# Altium PCB LED6432Clock.PcbDoc (part 3 of 6)
Units mm, origin at the board's own origin, x right, y up, seen from the top; angles counter-clockwise.
Board outline 152.4 x 101.6 mm, 2 copper layers (Top Layer, Bottom Layer); 48 components, 0 nets, 638 pads, 127 vias.
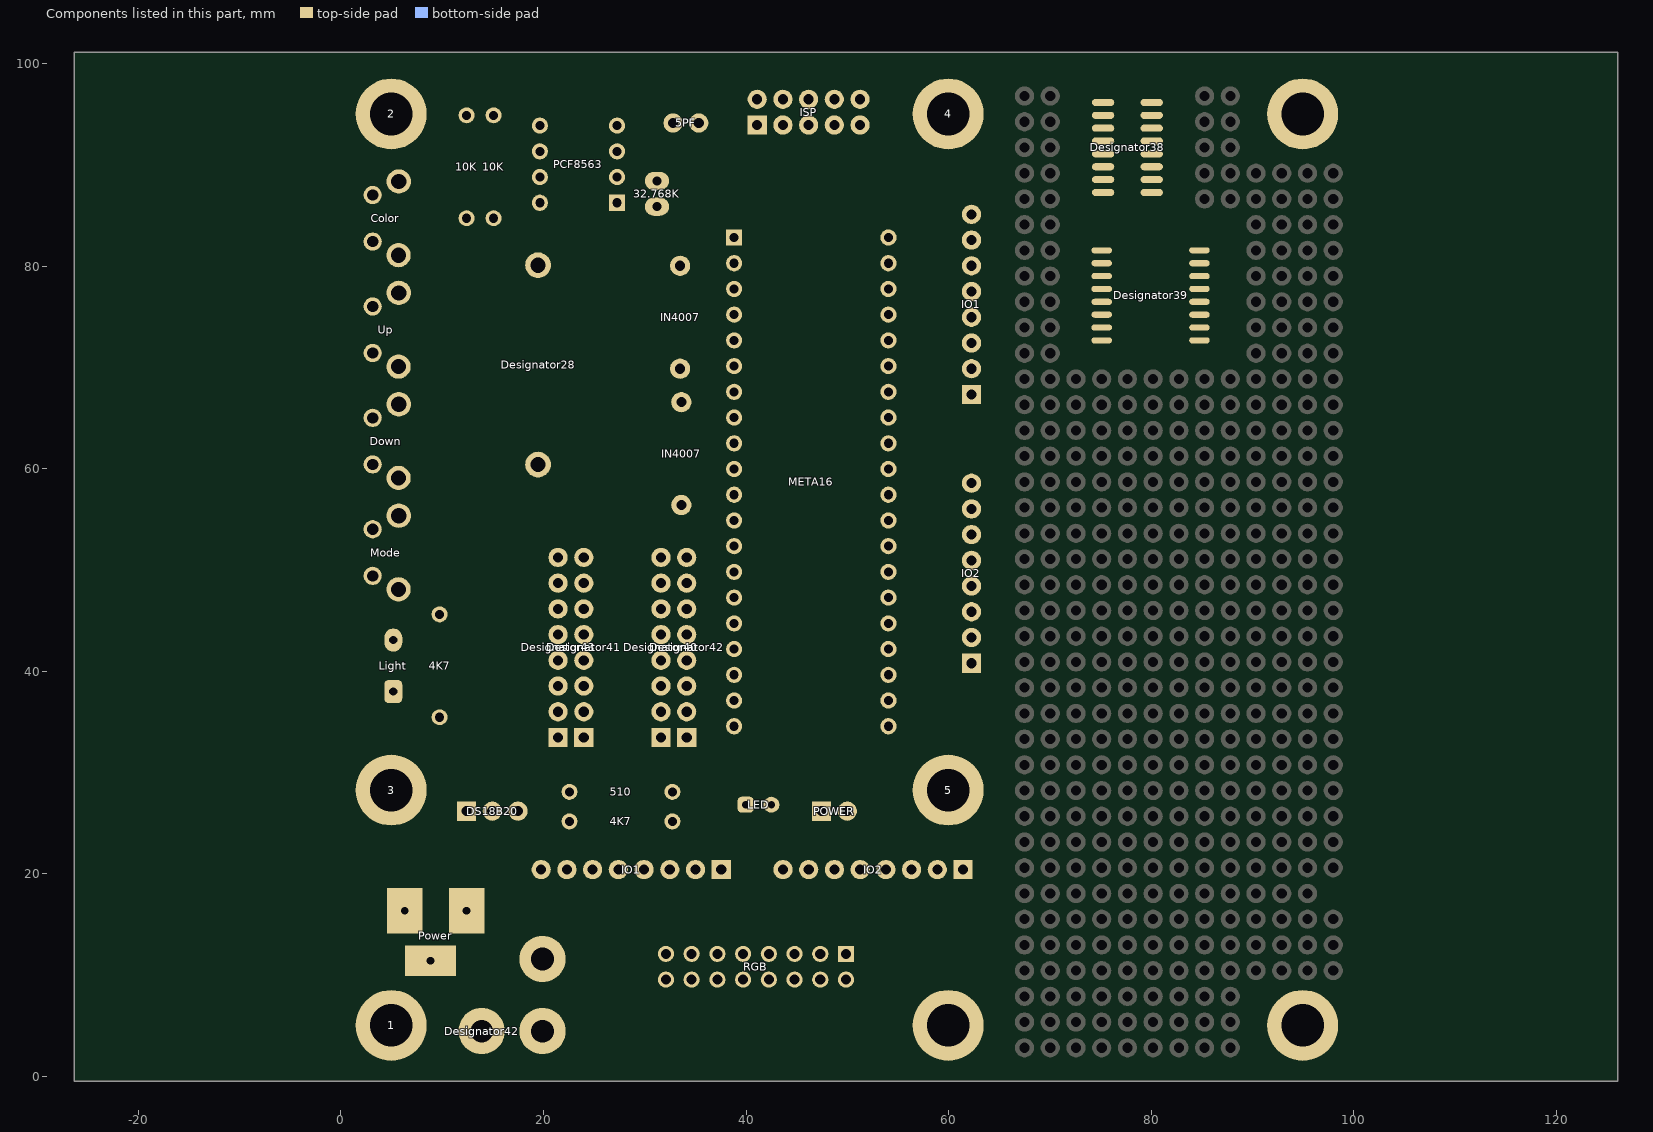
[diagram p3: the components of this part, seen from the top]

## Via types
v1: diameter 0.6, hole 0.3, Top Layer to Bottom Layer, 67 vias
v2: diameter 1.27, hole 0.711, Top Layer to Bottom Layer, 60 vias

## Nets (pads, with @x,y where several pads share a name; then routed paths per layer and width w, separated by ;. In a path a pad name is that pad's centre, name@x,y a point inside that pad or via, vN(x,y) a via of type N, cw(c..) or ccw(c..) an arc to the next point about the centre after c; other vN are vias at no path point) (continued)
copper on no net: (continued)
  Top Layer w0.16: 88.87,72.885 cw(c87.385,71.399) 89.485,71.399 ccw(c87.385,71.399) 88.87,72.885 ; 88.87,72.885 ccw(c90.355,74.37) 90.355,72.269 cw(c90.355,74.37) 88.87,72.885 ; 88.87,75.425 cw(c87.385,73.939) 89.485,73.939 ccw(c87.385,73.939) 88.87,75.425 ; 88.87,75.425 ccw(c90.355,76.91) 90.355,74.809 cw(c90.355,76.91) 88.87,75.425 ; 88.92,83.972 ccw(c88.92,84.911) 89.737,84.449 ; 88.92,83.972 ccw(c88.92,84.911) 89.737,84.449 ; 88.92,83.972 ccw(c88.92,84.911) 89.737,84.449 ; 88.92,83.972 ccw(c88.92,84.911) 89.737,84.449 ; 89.014,83.972 cw(c89.014,82.848) 89.836,83.615 ; 89.014,83.972 cw(c89.014,82.848) 89.836,83.615 ; 89.014,83.972 cw(c89.014,82.848) 89.836,83.615 ; 89.014,83.972 cw(c89.014,82.848) 89.836,83.615 ; 89.06,80.264 cw(c90.116,79.208) 90.267,80.694 ccw(c90.116,79.208) 89.06,80.264 ; 89.06,80.264 ccw(c88.004,81.32) 89.49,81.471 cw(c88.004,81.32) 89.06,80.264 ; 89.143,72.611 cw(c87.931,71.399) 89.645,71.399 ccw(c87.931,71.399) 89.143,72.611 ; 89.143,72.611 ccw(c90.355,73.823) 90.355,72.109 cw(c90.355,73.823) 89.143,72.611 ; 89.143,75.151 cw(c87.931,73.939) 89.645,73.939 ccw(c87.931,73.939) 89.143,75.151 ; 89.143,75.151 ccw(c90.355,76.363) 90.355,74.649 cw(c90.355,76.363) 89.143,75.151 ; 89.162,77.673 cw(c88.311,76.823) 89.497,76.623 ccw(c88.311,76.823) 89.162,77.673 ; 89.162,77.673 ccw(c90.012,78.524) 90.211,77.337 cw(c90.012,78.524) 89.162,77.673 ; 89.195,83.972 ccw(c89.195,84.756) 89.877,84.37 ; 89.195,83.972 ccw(c89.195,84.756) 89.877,84.37 ; 89.195,83.972 ccw(c89.195,84.756) 89.877,84.37 ; 89.195,83.972 ccw(c89.195,84.756) 89.877,84.37 ; 89.298,80.502 cw(c90.16,79.64) 90.284,80.853 ccw(c90.16,79.64) 89.298,80.502 ; 89.298,80.502 ccw(c88.436,81.364) 89.649,81.488 cw(c88.436,81.364) 89.298,80.502 ; 89.381,77.454 cw(c88.687,76.759) 89.655,76.597 ccw(c88.687,76.759) 89.381,77.454 ; 89.381,77.454 ccw(c90.075,78.148) 90.238,77.18 cw(c90.075,78.148) 89.381,77.454 ; 89.382,83.972 cw(c89.382,83.192) 89.953,83.724 ; 89.382,83.972 cw(c89.382,83.192) 89.953,83.724 ; 89.382,83.972 cw(c89.382,83.192) 89.953,83.724 ; 89.382,83.972 cw(c89.382,83.192) 89.953,83.724 ; 89.416,72.338 cw(c88.478,71.399) 89.805,71.399 ccw(c88.478,71.399) 89.416,72.338 ; 89.416,72.338 ccw(c90.355,73.277) 90.355,71.949 cw(c90.355,73.277) 89.416,72.338 ; 89.416,74.878 cw(c88.478,73.939) 89.805,73.939 ccw(c88.478,73.939) 89.416,74.878 ; 89.416,74.878 ccw(c90.355,75.817) 90.355,74.489 cw(c90.355,75.817) 89.416,74.878 ; 89.537,80.741 cw(c90.204,80.073) 90.3,81.012 ccw(c90.204,80.073) 89.537,80.741 ; 89.537,80.741 ccw(c88.869,81.408) 89.808,81.504 cw(c88.869,81.408) 89.537,80.741 ; 89.601,77.234 cw(c89.063,76.696) 89.813,76.57 ccw(c89.063,76.696) 89.601,77.234 ; 89.601,77.234 ccw(c90.138,77.772) 90.264,77.022 cw(c90.138,77.772) 89.601,77.234 ; 12.394,70.341 ccw(c12.192,70.543) 12.478,70.543 cw(c12.192,70.543) 12.394,70.341 ; 12.429,70.376 cw(c12.688,70.117) 12.696,70.483 ccw(c12.688,70.117) 12.429,70.376 ; 19.358,42.192 ccw(c20.64,43.473) 21.211,41.753 cw(c20.64,43.473) 19.358,42.192 ; 19.372,44.819 ccw(c20.762,46.208) 21.257,44.307 cw(c20.762,46.208) 19.372,44.819 ; 19.541,42.008 ccw(c20.731,43.198) 21.262,41.601 cw(c20.731,43.198) 19.541,42.008 ; 19.57,44.621 ccw(c20.843,45.894) 21.297,44.152 cw(c20.843,45.894) 19.57,44.621 ; 19.725,41.825 ccw(c20.823,42.923) 21.312,41.449 cw(c20.823,42.923) 19.725,41.825 ; 19.768,44.423 ccw(c20.925,45.581) 21.337,43.997 cw(c20.925,45.581) 19.768,44.423 ; 19.907,40.043 ccw(c21.435,41.571) 21.435,39.409 cw(c21.435,41.571) 19.907,40.043 ; 19.908,41.642 ccw(c20.914,42.648) 21.363,41.298 cw(c20.914,42.648) 19.908,41.642 ; 19.914,49.662 ccw(c20.79,50.539) 21.2,49.369 cw(c20.79,50.539) 19.914,49.662 ; 19.965,44.226 ccw(c21.007,45.267) 21.377,43.842 cw(c21.007,45.267) 19.965,44.226 ; 19.968,39.981 cw(c18.526,38.539) 20.565,38.539 ccw(c18.526,38.539) 19.968,39.981 ; 20.091,41.459 ccw(c21.005,42.373) 21.413,41.146 cw(c21.005,42.373) 20.091,41.459 ; 20.093,49.483 ccw(c20.883,50.273) 21.253,49.218 cw(c20.883,50.273) 20.093,49.483 ; 20.163,44.028 ccw(c21.088,44.954) 21.418,43.687 cw(c21.088,44.954) 20.163,44.028 ; 20.18,39.769 ccw(c21.435,41.025) 21.435,39.249 cw(c21.435,41.025) 20.18,39.769 ; 20.241,39.708 cw(c19.073,38.539) 20.725,38.539 ccw(c19.073,38.539) 20.241,39.708 ; 20.273,49.303 ccw(c20.977,50.006) 21.306,49.067 cw(c20.977,50.006) 20.273,49.303 ; 20.274,41.275 ccw(c21.097,42.098) 21.464,40.994 cw(c21.097,42.098) 20.274,41.275 ; 20.345,49.231 cw(c19.814,48.699) 20.565,48.699 ccw(c19.814,48.699) 20.345,49.231 ; 20.361,43.831 ccw(c21.17,44.64) 21.458,43.532 cw(c21.17,44.64) 20.361,43.831 ; 20.453,39.496 ccw(c21.435,40.479) 21.435,39.089 cw(c21.435,40.479) 20.453,39.496 ; 20.453,49.123 ccw(c21.07,49.74) 21.359,48.916 cw(c21.07,49.74) 20.453,49.123 ; 20.457,41.092 ccw(c21.188,41.823) 21.514,40.842 cw(c21.188,41.823) 20.457,41.092 ; 20.514,39.435 cw(c19.619,38.539) 20.885,38.539 ccw(c19.619,38.539) 20.514,39.435 ; 20.726,39.223 ccw(c21.435,39.932) 21.435,38.929 cw(c21.435,39.932) 20.726,39.223 ; v1@26.372,82.608 cw(c27.008,82.608) 26.558,83.058 ccw(c27.008,82.608) v1@26.372,82.608 ; v1@26.532,82.608 cw(c27.554,82.608) 26.831,83.331 ccw(c27.554,82.608) v1@26.532,82.608 ; 31.577,12.6 ccw(c29.428,14.748) 32.467,14.748 cw(c29.428,14.748) 31.577,12.6 ; 31.69,12.486 ccw(c29.815,14.362) 32.467,14.362 cw(c29.815,14.362) 31.69,12.486 ; 31.804,12.373 ccw(c30.201,13.976) 32.467,13.976 cw(c30.201,13.976) 31.804,12.373 ; 31.917,12.26 ccw(c30.587,13.59) 32.467,13.59 cw(c30.587,13.59) 31.917,12.26 ; 32.03,12.147 ccw(c30.973,13.203) 32.467,13.203 cw(c30.973,13.203) 32.03,12.147 ; 32.143,12.034 ccw(c31.36,12.817) 32.467,12.817 cw(c31.36,12.817) 32.143,12.034 ; 32.467,12.909 ccw(c32.905,12.909) 32.596,12.6 cw(c32.905,12.909) 32.467,12.909 ; 33.678,51.782 ccw(c32.755,52.876) 34.186,52.876 cw(c32.755,52.876) 33.678,51.782 ; 33.781,51.66 ccw(c33.045,52.532) 34.186,52.532 cw(c33.045,52.532) 33.781,51.66 ; 34.186,52.445 ccw(c35.341,52.445) 34.524,51.628 cw(c35.341,52.445) 34.186,52.445 ; 34.186,52.831 ccw(c35.727,52.831) 34.637,51.741 cw(c35.727,52.831) 34.186,52.831 ; 34.186,53.217 ccw(c36.113,53.217) 34.751,51.855 cw(c36.113,53.217) 34.186,53.217 ; 36.32,81.775 cw(c37.458,81.775) 36.653,82.58 ccw(c37.458,81.775) 36.32,81.775 ; 36.32,82.161 cw(c37.072,82.161) 36.54,82.693 ccw(c37.072,82.161) 36.32,82.161 ; 36.657,12.6 ccw(c35.443,13.814) 37.16,13.814 cw(c35.443,13.814) 36.657,12.6 ; 36.77,12.486 ccw(c35.829,13.427) 37.16,13.427 cw(c35.829,13.427) 36.77,12.486 ; 36.884,12.373 ccw(c36.216,13.041) 37.16,13.041 cw(c36.216,13.041) 36.884,12.373 ; 37.16,13.071 ccw(c38.147,13.071) 37.449,12.373 cw(c38.147,13.071) 37.16,13.071 ; 37.16,13.457 ccw(c38.533,13.457) 37.562,12.486 cw(c38.533,13.457) 37.16,13.457 ; 37.16,13.844 ccw(c38.92,13.844) 37.676,12.6 cw(c38.92,13.844) 37.16,13.844 ; v1@38.933,88.295 cw(c38.741,88.103) 39.012,88.103 ccw(c38.741,88.103) v1@38.933,88.295 ; 39.012,87.962 cw(c39.343,87.962) 39.19,88.255 ccw(c39.343,87.962) 39.012,87.962 ; v1@40.764,13.484 cw(c40.327,13.047) 40.945,13.047 ccw(c40.327,13.047) v1@40.764,13.484 ; 40.945,13.17 cw(c41.389,13.17) 41.075,13.484 ccw(c41.389,13.17) 40.945,13.17 ; 41.918,17.839 ccw(c39.464,20.294) 42.934,20.395 cw(c39.464,20.294) 41.918,17.839 ; 42.181,18.101 ccw(c39.973,20.309) 43.094,20.399 cw(c39.973,20.309) 42.181,18.101 ; 42.443,18.364 ccw(c40.483,20.324) 43.254,20.404 cw(c40.483,20.324) 42.443,18.364 ; v1@42.489,42.53 ccw(c41.561,43.458) 42.873,43.458 cw(c41.561,43.458) v1@42.489,42.53 ; v1@42.602,42.417 ccw(c41.948,43.072) 42.873,43.072 cw(c41.948,43.072) v1@42.602,42.417 ; 42.705,18.626 ccw(c40.993,20.338) 43.413,20.409 cw(c40.993,20.338) 42.705,18.626 ; v1@42.715,42.304 ccw(c42.334,42.685) 42.873,42.685 cw(c42.334,42.685) v1@42.715,42.304 ; 42.968,18.888 ccw(c41.503,20.353) 43.573,20.413 cw(c41.503,20.353) 42.968,18.888 ; 43.138,68.475 cw(c42.286,67.622) 43.491,67.622 ccw(c42.286,67.622) 43.138,68.475 ; 43.23,19.151 ccw(c42.013,20.368) 43.733,20.418 cw(c42.013,20.368) 43.23,19.151 ; v1@43.253,13.484 cw(c42.51,12.741) 43.561,12.741 ccw(c42.51,12.741) v1@43.253,13.484 ; v1@43.366,13.597 cw(c42.896,13.127) 43.561,13.127 ccw(c42.896,13.127) v1@43.366,13.597 ; 43.411,68.202 cw(c42.832,67.622) 43.651,67.622 ccw(c42.832,67.622) 43.411,68.202 ; 43.492,19.413 ccw(c42.522,20.383) 43.893,20.423 cw(c42.522,20.383) 43.492,19.413 ; 43.61,72.933 cw(c44.669,72.933) 43.92,73.682 ccw(c44.669,72.933) 43.61,72.933 ; 43.61,73.32 cw(c44.282,73.32) 43.807,73.795 ccw(c44.282,73.32) 43.61,73.32 ; 43.684,67.929 cw(c43.378,67.622) 43.811,67.622 ccw(c43.378,67.622) 43.684,67.929 ; 43.746,82.074 cw(c44.425,81.395) 44.425,82.355 ccw(c44.425,81.395) 43.746,82.074 ; 44.019,82.347 cw(c44.425,81.941) 44.425,82.515 ccw(c44.425,81.941) 44.019,82.347 ; 46.05,15.345 cw(c47.622,15.345) 46.511,16.456 ccw(c47.622,15.345) 46.05,15.345 ; 46.05,15.731 cw(c47.236,15.731) 46.397,16.569 ccw(c47.236,15.731) 46.05,15.731 ; 46.05,16.117 cw(c46.849,16.117) 46.284,16.682 ccw(c46.849,16.117) 46.05,16.117 ; 46.05,16.503 cw(c46.463,16.503) 46.171,16.795 ccw(c46.463,16.503) 46.05,16.503 ; 46.069,16.453 ccw(c45.91,16.612) 46.135,16.612 cw(c45.91,16.612) 46.069,16.453 ; 47.014,91.931 ccw(c45.009,93.937) 47.845,93.937 cw(c45.009,93.937) 47.014,91.931 ; 47.287,92.204 ccw(c45.555,93.937) 48.005,93.937 cw(c45.555,93.937) 47.287,92.204 ; 47.561,92.478 ccw(c46.101,93.937) 48.165,93.937 cw(c46.101,93.937) 47.561,92.478 ; 47.75,92.667 cw(c48.715,91.702) 48.715,93.067 ccw(c48.715,91.702) 47.75,92.667 ; 47.834,92.751 ccw(c46.648,93.937) 48.325,93.937 cw(c46.648,93.937) 47.834,92.751 ; 48.023,92.94 cw(c48.715,92.249) 48.715,93.227 ccw(c48.715,92.249) 48.023,92.94 ; 48.107,93.024 ccw(c47.194,93.937) 48.485,93.937 cw(c47.194,93.937) 48.107,93.024 ; 49.375,91.498 ccw(c46.936,93.937) 50.385,93.937 cw(c46.936,93.937) 49.375,91.498 ; 49.648,91.771 ccw(c47.482,93.937) 50.545,93.937 cw(c47.482,93.937) 49.648,91.771 ; 49.921,92.044 ccw(c48.028,93.937) 50.705,93.937 cw(c48.028,93.937) 49.921,92.044 ; 50.194,92.317 ccw(c48.574,93.937) 50.865,93.937 cw(c48.574,93.937) 50.194,92.317 ; 50.467,92.59 ccw(c49.121,93.937) 51.025,93.937 cw(c49.121,93.937) 50.467,92.59 ; 50.724,92.847 cw(c51.255,92.316) 51.255,93.067 ccw(c51.255,92.316) 50.724,92.847 ; 50.74,92.863 ccw(c49.667,93.937) 51.185,93.937 cw(c49.667,93.937) 50.74,92.863 ; v1@50.795,52.36 ccw(c50.235,52.92) 51.026,52.92 cw(c50.235,52.92) v1@50.795,52.36 ; v1@50.908,52.247 ccw(c50.621,52.533) 51.026,52.533 cw(c50.621,52.533) v1@50.908,52.247 ; 51.026,52.552 ccw(c51.297,52.552) 51.106,52.36 cw(c51.297,52.552) 51.026,52.552 ; v1@51.153,85.665 cw(c51.153,85.379) 51.356,85.581 ccw(c51.153,85.379) v1@51.153,85.665 ; v1@51.213,85.885 ccw(c51.604,85.885) 51.328,85.609 cw(c51.604,85.885) v1@51.213,85.885 ; v1@51.373,85.885 ccw(c52.15,85.885) 51.601,85.336 cw(c52.15,85.885) v1@51.373,85.885 ; 53.548,83.339 ccw(c52.83,84.057) 53.846,84.057 cw(c52.83,84.057) 53.548,83.339 ; 53.661,83.225 ccw(c53.216,83.671) 53.846,83.671 cw(c53.216,83.671) 53.661,83.225 ; 53.846,83.92 ccw(c55.148,83.92) 54.227,82.999 cw(c55.148,83.92) 53.846,83.92 ; 53.846,84.306 ccw(c55.534,84.306) 54.34,83.112 cw(c55.534,84.306) 53.846,84.306 ; 53.846,84.692 ccw(c55.92,84.692) 54.453,83.225 cw(c55.92,84.692) 53.846,84.692 ; 53.846,85.078 ccw(c56.306,85.078) 54.567,83.339 cw(c56.306,85.078) 53.846,85.078 ; 58.99,59.055 cw(c58.99,55.307) 61.64,57.957 ccw(c58.99,55.307) 58.99,59.055 ; 59.376,59.055 cw(c59.376,55.693) 61.753,58.07 ccw(c59.376,55.693) 59.376,59.055 ; 59.762,59.055 cw(c59.762,56.079) 61.866,58.183 ccw(c59.762,56.079) 59.762,59.055 ; 60.149,59.055 cw(c60.149,56.466) 61.98,58.297 ccw(c60.149,56.466) 60.149,59.055 ; 60.535,59.055 cw(c60.535,56.852) 62.093,58.41 ccw(c60.535,56.852) 60.535,59.055 ; 60.921,59.055 cw(c60.921,57.238) 62.206,58.523 ccw(c60.921,57.238) 60.921,59.055 ; 61.308,59.055 cw(c61.308,57.625) 62.319,58.636 ccw(c61.308,57.625) 61.308,59.055 ; 61.32,59.055 ccw(c61.32,59.508) 61.64,59.188 cw(c61.32,59.508) 61.32,59.055 ; 70.035,71.949 ccw(c70.035,72.952) 70.745,72.243 cw(c70.035,72.952) 70.035,71.949 ; 70.035,72.109 ccw(c70.035,73.499) 71.018,72.516 cw(c70.035,73.499) 70.035,72.109 ; 70.035,72.269 ccw(c70.035,74.045) 71.291,72.789 cw(c70.035,74.045) 70.035,72.269 ; 70.035,74.489 ccw(c70.035,75.554) 70.788,74.801 cw(c70.035,75.554) 70.035,74.489 ; 70.035,74.649 ccw(c70.035,76.1) 71.061,75.074 cw(c70.035,76.1) 70.035,74.649 ; 70.035,74.809 ccw(c70.035,76.646) 71.334,75.347 cw(c70.035,76.646) 70.035,74.809 ; 70.311,79.295 ccw(c71.1,80.084) 71.1,78.969 cw(c71.1,80.084) 70.311,79.295 ; 70.424,78.63 cw(c71.241,77.814) 71.241,78.969 ccw(c71.241,77.814) 70.424,78.63 ; 70.424,79.408 ccw(c71.486,80.47) 71.486,78.969 cw(c71.486,80.47) 70.424,79.408 ; 70.425,71.399 cw(c71.692,71.399) 70.796,72.295 ccw(c71.692,71.399) 70.425,71.399 ; 70.425,73.939 cw(c71.631,73.939) 70.778,74.792 ccw(c71.631,73.939) 70.425,73.939 ; 70.537,78.517 cw(c71.627,77.428) 71.627,78.969 ccw(c71.627,77.428) 70.537,78.517 ; 70.537,79.521 ccw(c71.872,80.856) 71.872,78.969 cw(c71.872,80.856) 70.537,79.521 ; 70.585,71.399 cw(c72.238,71.399) 71.069,72.568 ccw(c72.238,71.399) 70.585,71.399 ; 70.585,73.939 cw(c72.177,73.939) 71.052,75.065 ccw(c72.177,73.939) 70.585,73.939 ; 70.651,78.404 cw(c72.013,77.042) 72.013,78.969 ccw(c72.013,77.042) 70.651,78.404 ; 70.651,79.635 ccw(c72.258,81.242) 72.258,78.969 cw(c72.258,81.242) 70.651,79.635 ; 70.745,71.399 cw(c72.784,71.399) 71.343,72.841 ccw(c72.784,71.399) 70.745,71.399 ; 70.745,73.939 cw(c72.723,73.939) 71.325,75.338 ccw(c72.723,73.939) 70.745,73.939 ; 70.905,71.399 cw(c73.331,71.399) 71.616,73.114 ccw(c73.331,71.399) 70.905,71.399 ; 70.905,73.939 cw(c73.269,73.939) 71.598,75.611 ccw(c73.269,73.939) 70.905,73.939 ; 73.616,81.661 cw(c73.616,80.771) 74.245,81.4 ccw(c73.616,80.771) 73.616,81.661 ; 73.678,76.556 cw(c73.678,75.753) 74.245,76.32 ccw(c73.678,75.753) 73.678,76.556 ; 73.739,78.969 ccw(c73.739,79.685) 74.245,79.178 cw(c73.739,79.685) 73.739,78.969 ; 73.8,73.914 ccw(c73.8,74.543) 74.245,74.098 cw(c73.8,74.543) 73.8,73.914 ; 73.8,77.724 ccw(c73.8,78.353) 74.245,77.908 cw(c73.8,78.353) 73.8,77.724 ; 73.8,80.315 cw(c73.8,79.685) 74.245,80.13 ccw(c73.8,79.685) 73.8,80.315 ; 73.923,73.914 cw(c73.923,73.458) 74.245,73.78 ccw(c73.923,73.458) 73.923,73.914 ; 73.923,77.724 cw(c73.923,77.268) 74.245,77.59 ccw(c73.923,77.268) 73.923,77.724 ; 73.923,80.315 ccw(c73.923,80.771) 74.245,80.448 cw(c73.923,80.771) 73.923,80.315 ; 73.984,78.969 cw(c73.984,78.599) 74.245,78.86 ccw(c73.984,78.599) 73.984,78.969 ; 74.002,81.661 cw(c74.002,81.158) 74.358,81.514 ccw(c74.002,81.158) 74.002,81.661 ; 74.045,76.556 ccw(c74.045,76.838) 74.245,76.638 cw(c74.045,76.838) 74.045,76.556 ; 74.064,76.556 cw(c74.064,76.139) 74.358,76.434 ccw(c74.064,76.139) 74.064,76.556 ; 74.107,81.661 ccw(c74.107,81.857) 74.245,81.718 cw(c74.107,81.857) 74.107,81.661 ; 74.5,69.475 ccw(c73.524,70.451) 74.905,70.451 cw(c73.524,70.451) 74.5,69.475 ; 74.613,69.361 ccw(c73.91,70.065) 74.905,70.065 cw(c73.91,70.065) 74.613,69.361 ; 74.905,69.924 ccw(c76.18,69.924) 75.278,69.022 cw(c76.18,69.924) 74.905,69.924 ; 74.905,70.31 ccw(c76.566,70.31) 75.391,69.135 cw(c76.566,70.31) 74.905,70.31 ; 74.905,70.696 ccw(c76.952,70.696) 75.504,69.248 cw(c76.952,70.696) 74.905,70.696 ; 74.905,71.082 ccw(c77.338,71.082) 75.617,69.361 cw(c77.338,71.082) 74.905,71.082 ; 74.905,71.469 ccw(c77.725,71.469) 75.731,69.475 cw(c77.725,71.469) 74.905,71.469 ; 74.905,71.618 cw(c76.167,71.618) 75.274,72.51 ccw(c76.167,71.618) 74.905,71.618 ; 74.905,72.004 cw(c75.781,72.004) 75.161,72.624 ccw(c75.781,72.004) 74.905,72.004 ; 74.905,72.39 cw(c75.394,72.39) 75.048,72.737 ccw(c75.394,72.39) 74.905,72.39 ; 84.66,69.475 ccw(c83.009,71.125) 85.344,71.125 cw(c83.009,71.125) 84.66,69.475 ; 84.773,69.361 ccw(c83.396,70.739) 85.344,70.739 cw(c83.396,70.739) 84.773,69.361 ; 84.886,69.248 ccw(c83.782,70.353) 85.344,70.353 cw(c83.782,70.353) 84.886,69.248 ; 85,69.135 ccw(c84.168,69.967) 85.344,69.967 cw(c84.168,69.967) 85,69.135 ; 85.344,70.022 ccw(c86.438,70.022) 85.664,69.248 cw(c86.438,70.022) 85.344,70.022 ; 85.344,70.408 ccw(c86.824,70.408) 85.777,69.361 cw(c86.824,70.408) 85.344,70.408 ; 85.344,70.794 ccw(c87.21,70.794) 85.891,69.475 cw(c87.21,70.794) 85.344,70.794 ; 85.344,71.802 cw(c86.346,71.802) 85.638,72.51 ccw(c86.346,71.802) 85.344,71.802 ; 85.344,72.188 cw(c85.96,72.188) 85.524,72.624 ccw(c85.96,72.188) 85.344,72.188 ; 85.524,77.795 ccw(c85.819,78.09) 85.819,77.673 cw(c85.819,78.09) 85.524,77.795 ; 85.638,73.78 cw(c86.083,73.335) 86.083,73.965 ccw(c86.083,73.335) 85.638,73.78 ; 85.638,74.098 ccw(c85.96,74.421) 85.96,73.965 cw(c85.96,74.421) 85.638,74.098 ; 85.638,75.05 cw(c85.899,74.789) 85.899,75.159 ccw(c85.899,74.789) 85.638,75.05 ; 85.638,75.368 ccw(c86.144,75.875) 86.144,75.159 cw(c86.144,75.875) 85.638,75.368 ; 85.638,76.32 cw(c86.083,75.875) 86.083,76.505 ccw(c86.083,75.875) 85.638,76.32 ; 85.638,76.638 ccw(c85.96,76.961) 85.96,76.505 cw(c85.96,76.961) 85.638,76.638 ; 85.638,77.59 cw(c85.837,77.391) 85.837,77.673 ccw(c85.837,77.391) 85.638,77.59 ; 85.638,77.908 ccw(c86.205,78.476) 86.205,77.673 cw(c86.205,78.476) 85.638,77.908 ; 85.638,78.86 cw(c85.899,78.599) 85.899,78.969 ccw(c85.899,78.599) 85.638,78.86 ; 85.638,79.178 ccw(c86.144,79.685) 86.144,78.969 cw(c86.144,79.685) 85.638,79.178 ; 85.638,80.13 cw(c85.96,79.808) 85.96,80.264 ccw(c85.96,79.808) 85.638,80.13 ; 85.638,80.448 ccw(c86.083,80.893) 86.083,80.264 cw(c86.083,80.893) 85.638,80.448 ; 85.638,81.4 cw(c86.144,80.894) 86.144,81.61 ccw(c86.144,80.894) 85.638,81.4 ; 85.638,81.718 ccw(c85.899,81.979) 85.899,81.61 cw(c85.899,81.979) 85.638,81.718 ; 88.132,78.969 ccw(c88.132,81.242) 89.74,79.635 cw(c88.132,81.242) 88.132,78.969 ; 88.378,78.969 cw(c88.378,77.042) 89.74,78.404 ccw(c88.378,77.042) 88.378,78.969 ; 88.519,78.969 ccw(c88.519,80.856) 89.853,79.521 cw(c88.519,80.856) 88.519,78.969 ; 88.764,78.969 cw(c88.764,77.428) 89.853,78.517 ccw(c88.764,77.428) 88.764,78.969 ; 88.905,78.969 ccw(c88.905,80.47) 89.966,79.408 cw(c88.905,80.47) 88.905,78.969 ; 89.15,78.969 cw(c89.15,77.814) 89.966,78.63 ccw(c89.15,77.814) 89.15,78.969 ; 89.291,78.969 ccw(c89.291,80.084) 90.08,79.295 cw(c89.291,80.084) 89.291,78.969